# Altium PCB PCB1.PcbDoc
Units mil, origin at the board's own origin, x right, y up, seen from the top; angles counter-clockwise.
Board outline 6000 x 4000 mil, 2 copper layers (Top Layer, Bottom Layer); 9 components, 5 nets, 18 pads, 0 vias.
Unrouted connection lines stored in the file: 7.
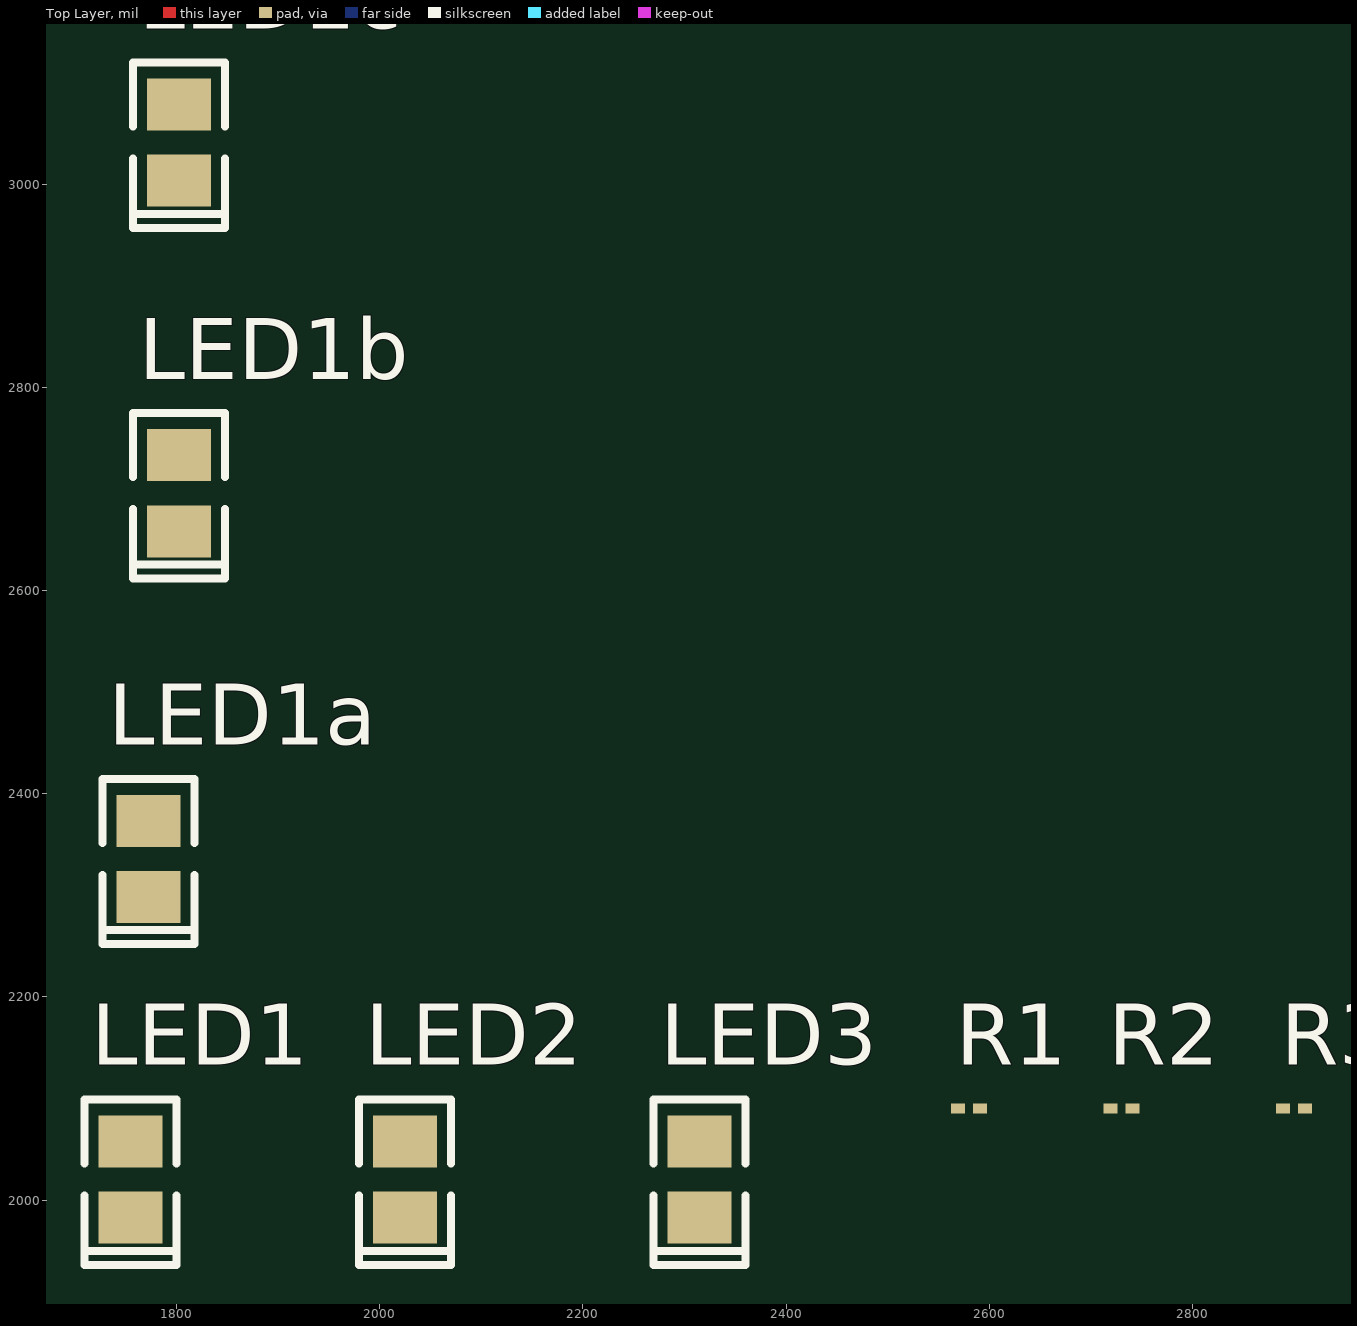
[diagram p0: Top Layer view]
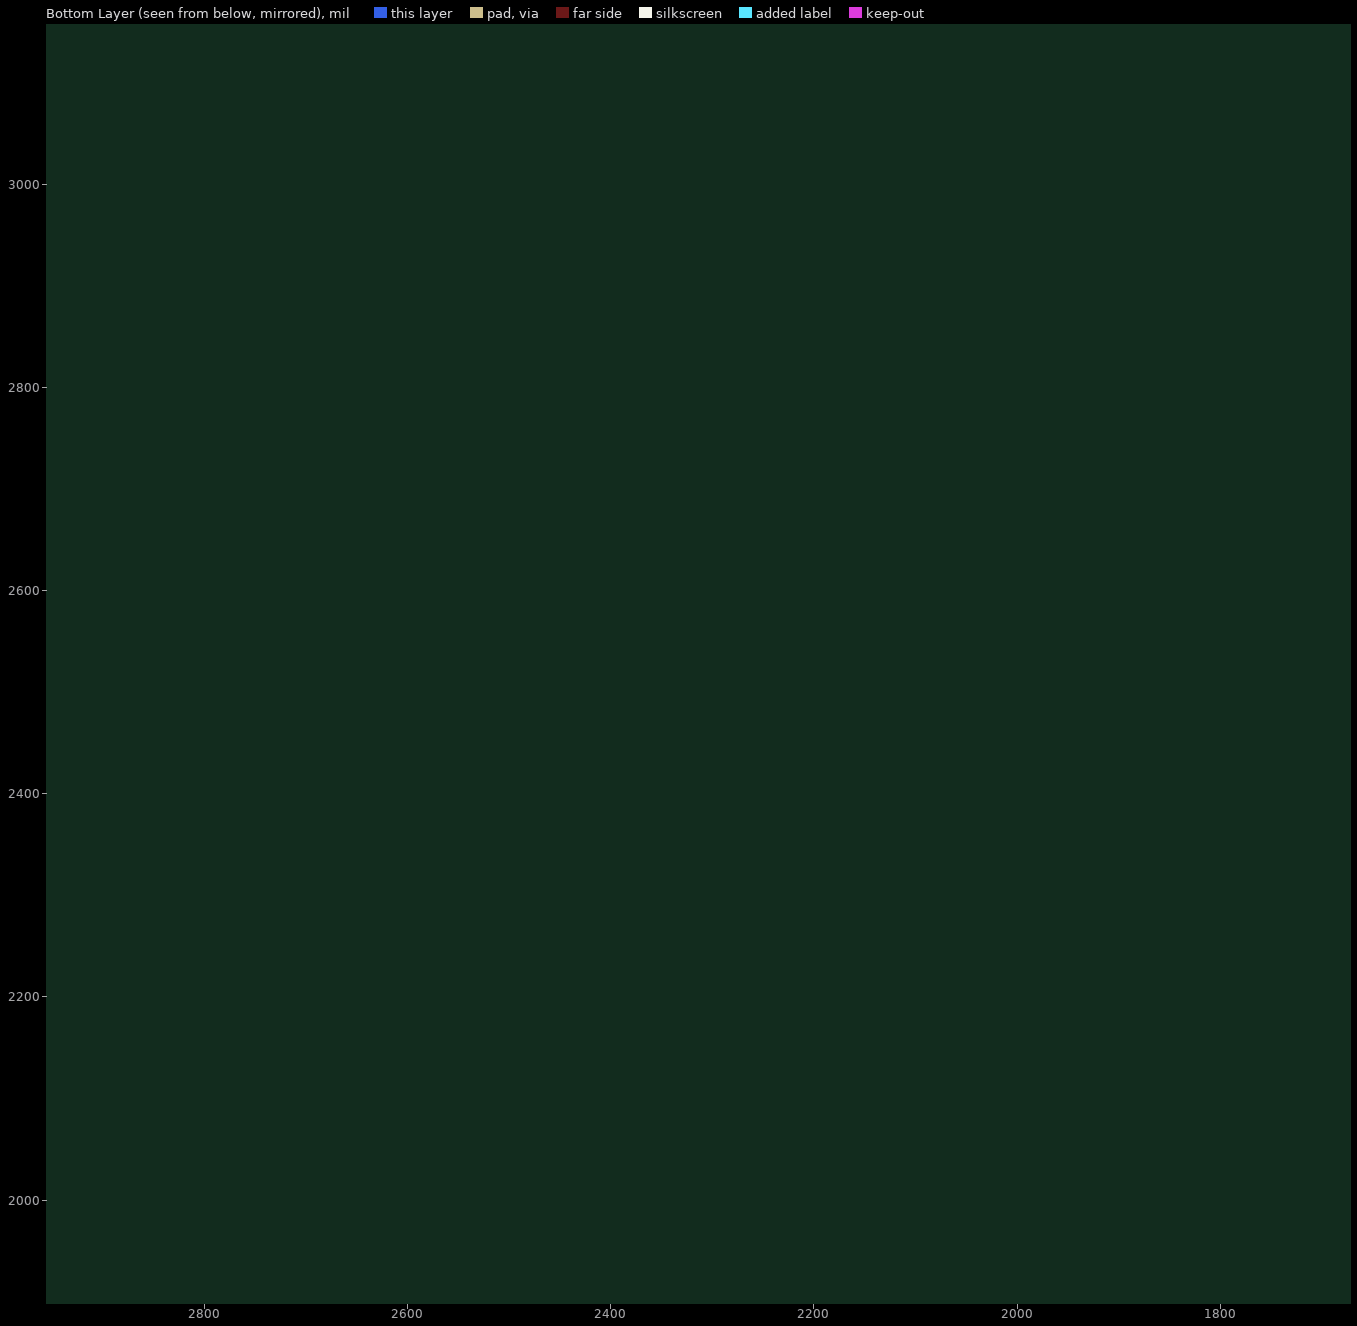
[diagram p1: Bottom Layer view, seen from below]

## Layer stack, top to bottom
Top Solder: solder mask 0.4, Solder Resist, Dk 3.5
Top Layer: signal copper 1.4
Dielectric 1: dielectric 12.6, FR-4, Dk 4.8
Bottom Layer: signal copper 1.4
Bottom Solder: solder mask 0.4, Solder Resist, Dk 3.5

## Board outline
0,5 6000,5 6000,4005 0,4005

## Design rules (kind name [scope] priority, off if disabled: settings)
Clearance [All] p1: gap=10 ignorepadtopadclearanceinfootprint=FALSE except(0: Arc-Hole Track-Hole SMDPad-Hole THPad-Hole Via-Hole Fill-Hole Poly-Hole Region-Hole Text-Hole)
PolygonConnect [All] p1: connectstyle=Relief reliefconductorwidth=10 reliefentries=4 polygonreliefangle="90 Angle" airgapwidth=10
RoutingVias [All] p1: holewidth=28 width=50 viastyle="Through Hole" minholewidth=28 minwidth=50 maxholewidth=28 maxwidth=50
SolderMaskExpansion [All] p1: expansion=4 istentingtop=FALSE
Width [All] p1: maxlimit=10 minlimit=10 preferedwidth=10
30 further rules are at their usual default settings.

## Classes and differential pairs
component class LEDS-managed: LED1 LED2 LED3 R1 R2 R3

## Components (designator, comment, footprint, x,y, rotation, side; value= is the part's Value field where it differs from the comment)
LED1 "LTST-C170KGKT" "LED2013 - GREEN" 1755,2020 r90 top
LED1a "LTST-C170KGKT" "LED2013 - GREEN" 1772.52,2335.64 r90 top
LED1b "LTST-C170KGKT" "LED2013 - GREEN" 1802.52,2695.64 r90 top
LED1c "LTST-C170KGKT" "LED2013 - GREEN" 1802.52,3040.64 r90 top
LED2 "LTST-C170EKT" "LED2013 - RED" 2025,2020 r90 top
LED3 "LTST-C170YKT" "LED2013 - YELLOW" 2315,2020 r90 top
R1 "ERA-0201-901132" "RESC60X30X26L15L (0201)" 2580,2090 r0 top value=150
R2 "ERA-0201-901132" "RESC60X30X26L15L (0201)" 2730,2090 r0 top value=150
R3 "ERA-0201-901132" "RESC60X30X26L15L (0201)" 2900,2090 r0 top value=150

## Footprints (in the part's own frame and the unit in brackets; to place one, negate y for a bottom-side part, rotate by r counter-clockwise, add the part's x,y. Pads: shape width x height; smd on the part's side, far side on the other; paste and mask are expansions set on the pad)
"LED2013 - GREEN" [mm]
  rect 1.3x1.6 smd: 1(0.95,0) 2(-0.95,0)
  silkscreen extent -2.13,-1.15 2,1.15, body extent -1.6,-0.75 1.6,0.75, height 0.67
"LED2013 - RED" [mm]
  rect 1.3x1.6 smd: 1(0.95,0) 2(-0.95,0)
  silkscreen extent -2.13,-1.15 2,1.15, body extent -1.6,-0.75 1.6,0.75, height 0.67
"LED2013 - YELLOW" [mm]
  rect 1.3x1.6 smd: 1(0.95,0) 2(-0.95,0)
  silkscreen extent -2.13,-1.15 2,1.15, body extent -1.6,-0.75 1.6,0.75, height 0.67
"RESC60X30X26L15L (0201)" [mm] "Chip Resistor, 2-Leads, Body 0.60x0.30mm, IPC High Density"
  rect 0.35x0.25 smd: 1(-0.275,0) 2(0.275,0)
  body extent -0.32,-0.16 0.31,0.17, height 0.26

## Part data
LED1 LED1a LED1b LED1c: library part CMP-007-00052-1, "LED, Green 0805 (2013)", Category=LED, Design Item Id=LED-GRN-0805, Purchase Item ID=135.1001
LED2: library part CMP-007-00053-1, "LED, Red 0805 (2013)", Category=LED, Design Item Id=LED-RED-0805, Purchase Item ID=135.1003
LED3: library part CMP-007-00051-1, "LED, Yellow 0805 (2013)", Category=LED, Design Item Id=LED-YLW-0805, Purchase Item ID=135.1002
R1 R2 R3: library part CMP-009-00404-1, "Res, 150R, 0.05W, 1%,  0201 SMD", Case/Package="0201 (0603 Metric)", Manufacturer 1=Panasonic-ECG, Manufacturer 2="Stackpole Electronics Inc", Manufacturer 3=Yageo, Manufacturer Part Number 1=ERJ-1GNF1500C, Manufacturer Part Number 2=RMCF0201FT150R, Power=50mW, SUPPLIER PART NUMBER 1=P122742DKR-ND, Temp Co=200ppm/C, Tolerance=0.01%, NUV_DESCRIPTION="Res, 150R, 0.05W, 1%,  0201 SMD", NUV_Level=Level-3, NUV_PART_NO=ERA-0201-901132, RoHS=RoHS, SUPPLIER 1=Digi-Key, SUPPLIER 2=Digi-Key, SUPPLIER 3=Digi-Key, SUPPLIER PART NUMBER 2=RMCF0201FT150RDKR-ND, SUPPLIER PART NUMBER 3=YAG5158DKR-ND, TYPE="Thick Film Chip Resistor"

## Nets (pads, with @x,y where several pads share a name; then routed paths per layer and width w, separated by ;. In a path a pad name is that pad's centre, name@x,y a point inside that pad or via, vN(x,y) a via of type N, cw(c..) or ccw(c..) an arc to the next point about the centre after c; other vN are vias at no path point)
GND: LED1.2 LED2.2
NetLED1_1: LED1.1 R1.1
NetLED2_1: LED2.1 R2.1
NetLED3_1: LED3.1 R3.1
VCC: LED3.2 R1.2 R2.2 R3.2
pads on no net: LED1a.1 LED1a.2 LED1b.1 LED1b.2 LED1c.1 LED1c.2